# Altium PCB motion_sensor.PcbDoc
Units mm, origin at the board's own origin, x right, y up, seen from the top; angles counter-clockwise.
Board outline 25 x 25 mm, 2 copper layers (Top Layer, Bottom Layer), stack 1.671 mm thick; 48 components, 55 nets, 199 pads, 53 vias.
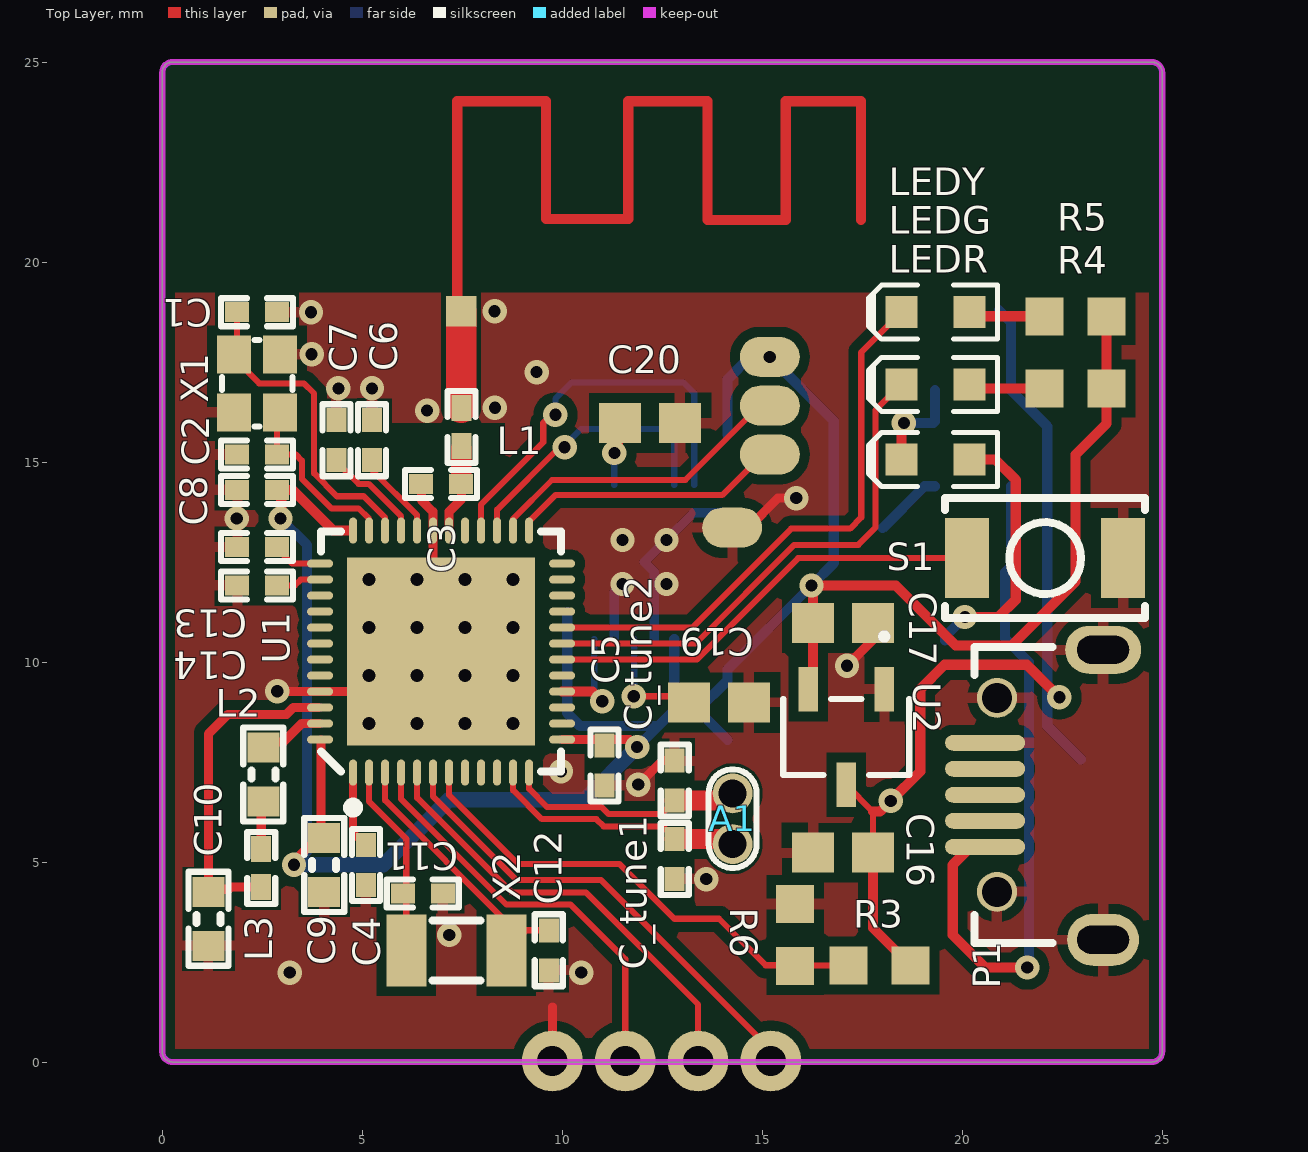
[diagram p0: Top Layer view]
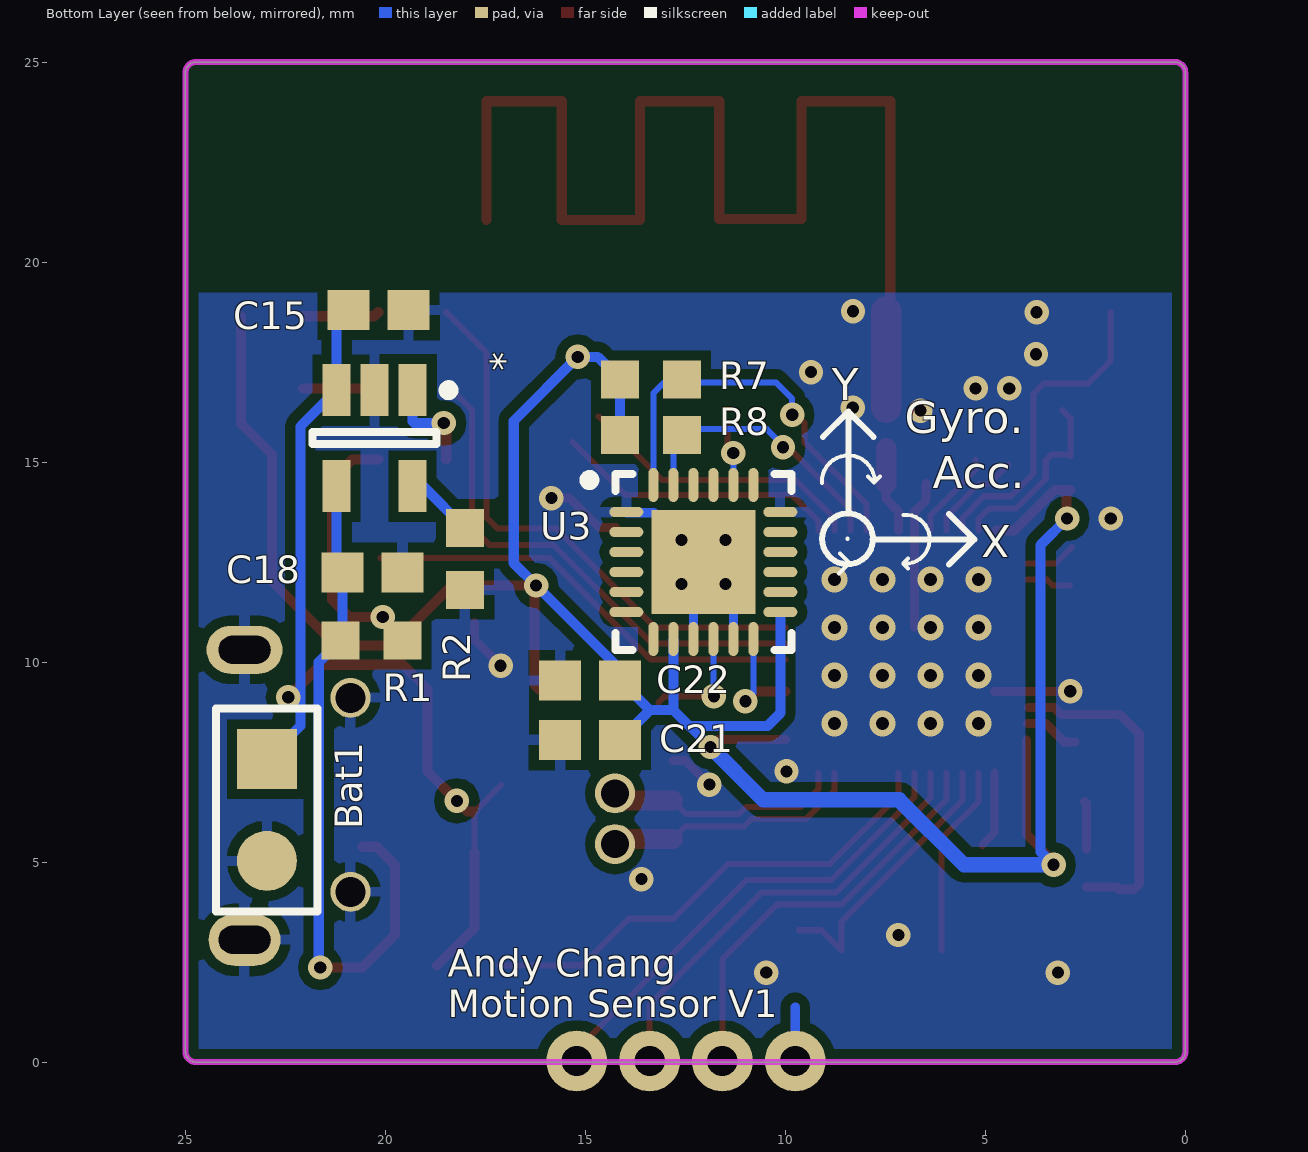
[diagram p1: Bottom Layer view, seen from below]
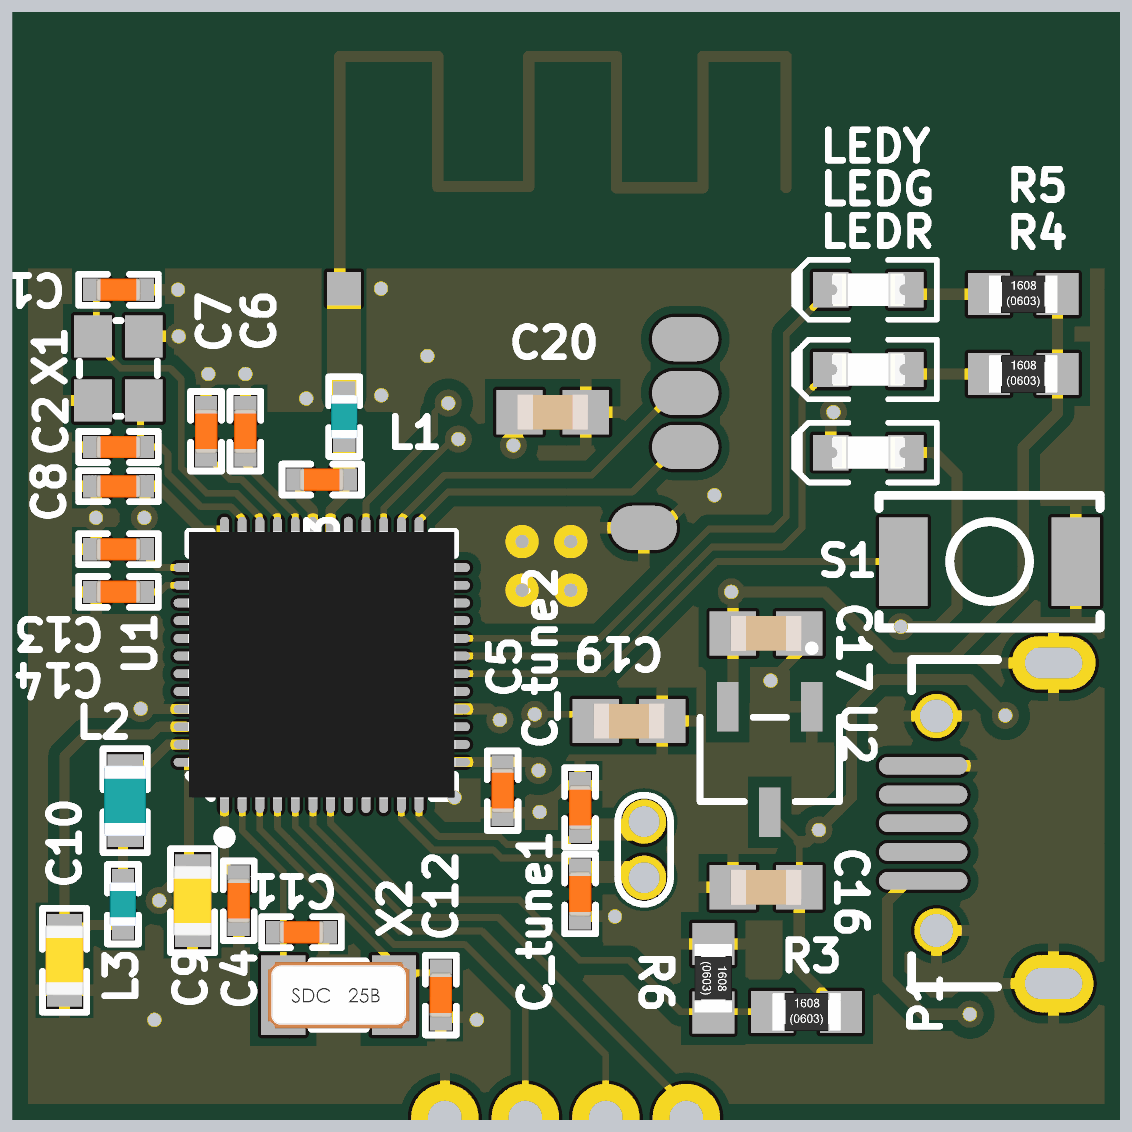
[diagram p2: 3D render of the assembled board from above, using the file's embedded part models]
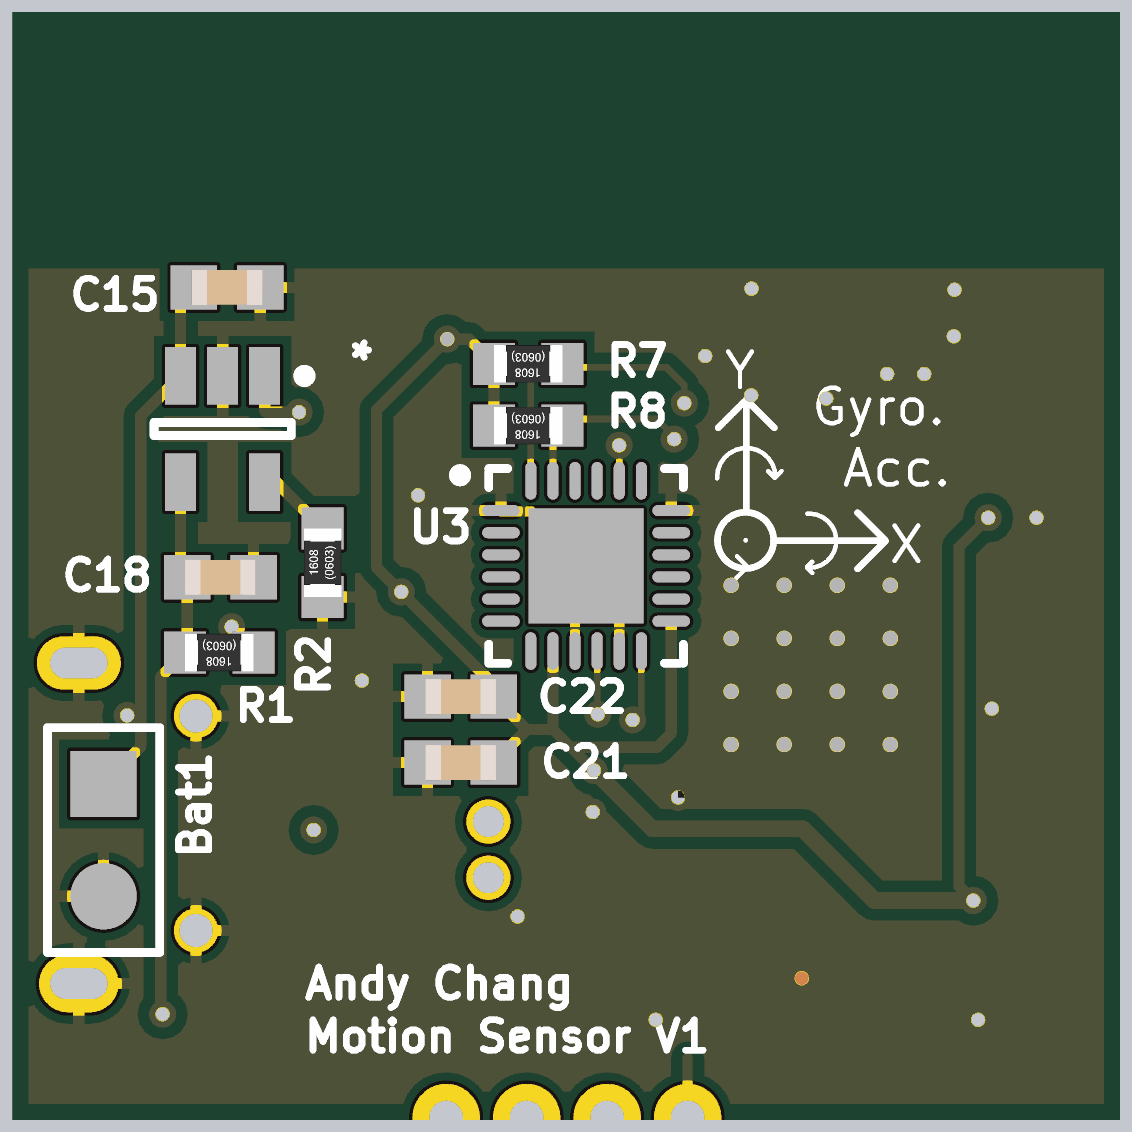
[diagram p3: 3D render of the assembled board from below, using the file's embedded part models]

## Layer stack, top to bottom
Top Solder: solder mask 0.0102, Solder Resist, Dk 3.5
Top Layer: signal copper 0.0356
Dielectric1: core 1.6002, FR-4, Dk 4.8
Bottom Layer: signal copper 0.0356
Bottom Solder: solder mask 0.0102, Solder Resist, Dk 3.5

## Board outline
0.254,0 cw(c0.254,0.254) 0,0.254 0,24.74 cw(c0.26,24.74) 0.26,25 24.733,25 cw(c24.733,24.733) 25,24.733 25,0.26 cw(c24.74,0.26) 24.74,0

## Design rules (kind name [scope] priority, off if disabled: settings)
Clearance Polygon_ANT [(InNamedPolygon('Top_Layer-GND')) or (InNamedPolygon('Bottom_Layer-GND')) vs InNet('RF')] p1: gap=0.127
Clearance Polygon [(InNamedPolygon('Top_Layer-GND')) or (InNamedPolygon('Bottom_Layer-GND'))] p2: gap=0.254
Clearance [All] p3: gap=0.152
ComponentClearance [All] p1 off: gap=0.254 collisioncheckmode=3 verticalgap=0.254 showdistances=FALSE
FabricationTestPointUsage TestPointUsage [All] p1: valid=0 allowmultiple=FALSE
FabricationTestpoint Testpoint [All] p1: side=3 testpointundercomponent=TRUE minsize=1.016 maxsize=2.54 preferedsize=1.524 minholesize=0 maxholesize=1.016 preferedholesize=0.813 testpointgrid=0.025 allowsidetop=TRUE allowsidebottom=TRUE usegrid=TRUE gridtolerance=0
Height [All] p1 off: minheight=0 maxheight=25.4 prefheight=12.7
HoleSize [All] p1: absolutevalues=TRUE maxlimit=4.064 minlimit=0.3 maxpercent=80.000 minpercent=20.000
MinimumAnnularRing [All] p1 off: minimumring=0.152
PolygonConnect PolygonConnect_1 [isVia and innet(gnd)] p1: connectstyle=Direct reliefconductorwidth=0.254 reliefentries=4 polygonreliefangle="90 Angle" airgapwidth=0.254
PolygonConnect [All] p2: connectstyle=Relief reliefconductorwidth=0.254 reliefentries=4 polygonreliefangle="90 Angle" airgapwidth=0.254
RoutingVias [All] p1: holewidth=0.406 width=0.813 viastyle="Through Hole" minholewidth=0.254 minwidth=0.254 maxholewidth=0.711 maxwidth=1.27
ShortCircuit ShortCircuit_NFC_ANT [InNet('NFC1') vs InNet('NFC2')] p1: allowed=TRUE
ShortCircuit [All] p2: allowed=FALSE
SilkToSolderMaskClearance SilkscreenOverComponentPads [IsPad] p1: minsilkscreentomaskgap=0.254 clearancetoexposedcopper=TRUE
SolderMaskExpansion [All] p1: expansion=0.076
Width [All] p1: maxlimit=2.54 minlimit=0.152 preferedwidth=0.152
23 further rules are at their usual default settings.

## Classes and differential pairs
component class mcu: A1 C1 C2 C3 C4 C5 C6 C7 C8 C9 C10 C11 C12 C13 C14 C_tune1 C_tune2 L1 L2 L3 R7 R8 U1 X1 X2
component class port: Bat1 C19 C20 C21 C22 LEDG LEDY R3 R4 R5 R6 S1 U3
component class power: * C15 C16 C17 C18 LEDR P1 R1 R2 U2

## Components (designator, comment, footprint, x,y, rotation, side; value= is the part's Value field where it differs from the comment)
* "MCP73832T-2ACI/OT" SOT-23-OT5_M 20.269,15.596 r270 bottom
A1 "NFC Antenna" TP_2x1mm_TH 14.26,6.083 r180 top
Bat1 "Bat Holder CR2032" HDR1X2 22.962,7.569 r270 bottom
C1 "12pF" CAPC1005X04L 2.373,18.745 r0 top
C2 "12pF" CAPC1005X04L 2.373,15.189 r180 top
C3 "0.8pF" CAPC1005X04L 6.97,14.453 r0 top
C4 "100nF" CAPC1005X04L 5.091,4.928 r270 top
C5 "100nF" CAPC1005X04L 11.06,7.417 r270 top
C6 "N.C." CAPC1005X04L 5.243,15.545 r270 top
C7 "100pF" CAPC1005X04L 4.354,15.545 r90 top
C8 "100nF" CAPC1005X04L 2.373,14.3 r180 top
C9 "4.7µF" CAPC1608X06L 4.049,4.928 r270 top
C10 "1.0µF" CAPC1608X06L 1.154,3.581 r90 top
C11 "12pF" CAPC1005X04L 6.513,4.216 r0 top
C12 "12pF" CAPC1005X04L 9.663,2.794 r270 top
C13 "12pF" CAPC1005X04L 2.373,12.878 r180 top
C14 "12pF" CAPC1005X04L 2.373,11.913 r180 top
C15 "Cap Semi" C0603 20.168,18.796 r0 bottom
C16 "Cap Semi" C0603 17.018,5.232 r0 top
C17 "Cap Semi" C0603 17.018,10.973 r180 top
C18 "Cap Semi" C0603 20.32,12.243 r0 bottom
C19 "Cap Semi" C0603 13.919,8.992 r180 top
C20 "Cap Semi" C0603 12.192,15.977 r180 top
C21 "Cap Semi" C0603 14.884,8.052 r180 bottom
C22 "Cap Semi" C0603 14.884,9.544 r180 bottom
C_tune1 "TBD" CAPC1005X04L 12.812,5.08 r270 top
C_tune2 "TBD" CAPC1005X04L 12.812,7.036 r270 top
L1 "3.9nH" INDC1005X04L 7.478,15.875 r90 top
L2 "10µH" INDC1608X06L 2.525,7.188 r90 top
L3 "15nH" INDC1005X04L 2.475,4.851 r90 top
LEDG "LED" 0603 19.329,16.942 r180 top
LEDR "LED" 0603 19.329,15.062 r180 top
LEDY "LED" 0603 19.329,18.745 r180 top
P1 "USB-MICRO" USB-MICRO 23.52,6.68 r90 top
R1 "Resistors SMD" R0603-M 20.345,10.541 r0 bottom
R2 "Resistors SMD" R0603-M 18.009,12.573 r90 bottom
R3 "Resistors SMD" R0603-M 17.932,2.413 r0 top
R4 "Resistors SMD" R0603-M 22.835,16.84 r0 top
R5 "Resistors SMD" R0603-M 22.835,18.644 r0 top
R6 "Resistors SMD" R0603-M 15.824,3.175 r270 top
R7 "Resistors SMD" R0603-M 13.36,17.069 r0 bottom
R8 "Resistors SMD" R0603-M 13.36,15.672 r0 bottom
S1 "SW-PB" SWITCH_SMD_4x3_DHT-1185 22.073,12.598 r180 top
U1 "nRF52832-QFAA" QFN40P600X600X90-48N 6.97,10.262 r90 top locked
U2 "XC6206P121MR" SOT-23 17.101,8.123 r180 top
U3 "MPU-6050" MPU-6050 12.05,12.5 r180 bottom
X1 "32MHz" BT-XTAL_2016 2.373,16.967 r270 top
X2 "32.768kHz" XTAL_3215 7.351,2.794 r0 top

## Footprints (in the part's own frame and the unit in brackets; to place one, negate y for a bottom-side part, rotate by r counter-clockwise, add the part's x,y. Pads: shape width x height; smd on the part's side, far side on the other; paste and mask are expansions set on the pad)
0603 [mm]
  round 0.254 on Mech15: 0(0,0)
  rect 0.8x0.8 smd: 1(-0.85,0) 2(0.85,0)
  Top Layer pour cut-out: -0.5,0.5 0.5,0.5 0.5,-0.5 -0.5,-0.5
  silkscreen extent -1.55,-0.67 1.68,0.67, body extent -0.83,-0.36 0.83,0.36, height 0.68
BT-XTAL_2016 [mm] "Crystal 2.0 x 1.6 mm"
  rect 0.95x0.85 smd: 1(-0.725,-0.575) 2(0.725,-0.575) 3(0.725,0.575) 4(-0.725,0.575)
  silkscreen extent -1.08,-0.88 1.08,0.88
C0603 [mm] "Chip Capacitor, EIA 0603, IPC-7351 Level B Medium Density"
  round 0.254 on Mech15: 0(0,0)
  rect 1.05x1 smd: 1(-0.75,0) 2(0.75,0)
  Top Layer pour cut-out: -0.2,0.5 0.2,0.5 0.2,-0.5 -0.2,-0.5
  body extent -0.8,-0.4 0.8,0.4, height 0.78
CAPC1005X04L [mm] "Chip Capacitor, 2-Leads, Body 1.0x0.5mm, IPC High Density"
  rect 0.6x0.5 smd: 1(-0.5,0) 2(0.5,0)
  silkscreen extent -0.9,-0.35 0.9,0.35, body extent -0.51,-0.25 0.51,0.25, height 0.5
CAPC1608X06L [mm] "Chip Capacitor, 2-Leads, Body 1.6x0.8mm, IPC High Density"
  rect 0.75x0.8 smd: 1(-0.675,0) 2(0.675,0)
  silkscreen extent -1.17,-0.5 1.17,0.5, body extent -0.8,-0.43 0.8,0.43, height 0.8
HDR1X2 [mm] "Connector; Header; 2 Position"
  rect 1.5x1.5 smd: 1(0,0)
  round 1.5 smd: 2(2.54,0)
  silkscreen extent -1.27,-1.27 3.81,1.27
INDC1005X04L [mm] "Chip Inductor, 2-Leads, Body 1.0x0.5mm, IPC High Density"
  rect 0.65x0.5 smd: 1(-0.475,0) 2(0.475,0)
  silkscreen extent -0.9,-0.35 0.9,0.35, body extent -0.5,-0.3 0.5,0.3, height 0.5
INDC1608X06L [mm] "Chip Inductor, 2-Leads, Body 1.6x0.8mm, IPC High Density"
  rect 0.75x0.8 smd: 1(-0.675,0) 2(0.675,0)
  silkscreen extent -1.18,-0.5 1.17,0.5, body extent -0.8,-0.48 0.8,0.48, height 0.8
MPU-6050 [mm] "QFN, 24-Leads, Body 4.00x4.00mm, Pitch 0.50mm, Thermal Pad 2.60x2.60mm, IPC Medium Density"
  oval 0.85x0.25 smd: 1(-1.925,1.25) 2(-1.925,0.75) 3(-1.925,0.25) 4(-1.925,-0.25) 5(-1.925,-0.75) 6(-1.925,-1.25) 13(1.925,-1.25) 14(1.925,-0.75) 15(1.925,-0.25) 16(1.925,0.25) 17(1.925,0.75) 18(1.925,1.25)
  oval 0.25x0.85 smd: 7(-1.25,-1.925) 8(-0.75,-1.925) 9(-0.25,-1.925) 10(0.25,-1.925) 11(0.75,-1.925) 12(1.25,-1.925) 19(1.25,1.925) 20(0.75,1.925) 21(0.25,1.925) 22(-0.25,1.925) 23(-0.75,1.925) 24(-1.25,1.925)
  rect 2.6x2.6 smd: 25(0,0)
  silkscreen extent -2.98,-2.2 2.2,2.2, body extent -2.05,-2.05 2.05,2.05, height 0.95
QFN40P600X600X90-48N [mm] "QFN, 48-Leads, Body 6,0x6,0mm (max), Pitch 0,40mm, IPC Medium Density"
  oval 0.65x0.2 smd: 1(-3.025,2.2) 2(-3.025,1.8) 3(-3.025,1.4) 4(-3.025,1) 5(-3.025,0.6) 6(-3.025,0.2) 7(-3.025,-0.2) 8(-3.025,-0.6) 9(-3.025,-1) 10(-3.025,-1.4) 11(-3.025,-1.8) 12(-3.025,-2.2) 25(3.025,-2.2) 26(3.025,-1.8) 27(3.025,-1.4) 28(3.025,-1) 29(3.025,-0.6) 30(3.025,-0.2) 31(3.025,0.2) 32(3.025,0.6) 33(3.025,1) 34(3.025,1.4) 35(3.025,1.8) 36(3.025,2.2)
  oval 0.2x0.65 smd: 13(-2.2,-3.025) 14(-1.8,-3.025) 15(-1.4,-3.025) 16(-1,-3.025) 17(-0.6,-3.025) 18(-0.2,-3.025) 19(0.2,-3.025) 20(0.6,-3.025) 21(1,-3.025) 22(1.4,-3.025) 23(1.8,-3.025) 24(2.2,-3.025) 37(2.2,3.025) 38(1.8,3.025) 39(1.4,3.025) 40(1,3.025) 41(0.6,3.025) 42(0.2,3.025) 43(-0.2,3.025) 44(-0.6,3.025) 45(-1,3.025) 46(-1.4,3.025) 47(-1.8,3.025) 48(-2.2,3.025)
  rect 4.7x4.7 smd: 49(0,0)
  silkscreen extent -4.02,-3 3,3, body extent -3.02,-3.02 3.02,3.02, height 0.86
R0603-M [mm] "Chip Resistor, 2-Leads, Body 1.68x0.88mm, IPC Medium Density"
  rect 0.95x0.95 smd: 1(-0.775,0) 2(0.775,0)
  Top Layer pour cut-out: -0.254,0.675 0.254,0.675 0.254,-0.675 -0.254,-0.675
  body extent -0.77,-0.42 0.78,0.43, height 0.44
SOT-23 [mil]
  rect 19x44 smd paste+0 mask+0: 1(-37.4,-47) 2(37.4,-47) 3(0,47)
  silkscreen extent -62,-102 62,38, body extent 0,0 10,10, height 10
SOT-23-OT5_M [mm]
  rect 1.3x0.7 smd: 1(-1.2,0.95) 2(-1.2,0) 3(-1.2,-0.95) 4(1.2,-0.95) 5(1.2,0.95)
  silkscreen extent -1.32,-1.55 0.15,1.97, body extent -0.9,-1.55 0.9,1.55, height 1.45
SWITCH_SMD_4x3_DHT-1185 [mm]
  rect 1.1x2 smd: 1(-1.95,0) 2(1.95,0)
  silkscreen extent -2.5,-1.5 2.5,1.5
TP_2x1mm_TH [mm]
  round 1 hole 0.7: 1(0,-0.635) 2(0,0.635)
  silkscreen extent -0.6,-1.23 0.6,1.23
USB-MICRO [mm] "USB方孔"
  oval 1.3x1.8 hole 0.7 slot 1.3 at 90 deg: 0(-3.625,0)
  round 1 hole 0.75: 0(-2.425,2.65) 0(2.425,2.65)
  oval 1.2x1.9 hole 0.7 slot 1.3 at 90 deg: 0(3.625,0)
  oval 0.4x2 smd: 1(-1.3,2.95) 2(-0.65,2.95) 3(0,2.95) 4(0.65,2.95) 5(1.3,2.95)
  silkscreen extent -3.7,1.27 3.7,3.21
XTAL_3215 [mm] "XTAL SMD 3.2 x 1.5 mm"
  rect 1x1.8 smd: 1(-1.25,0) 2(1.25,0)
  silkscreen extent -0.6,-0.75 0.6,0.75, body extent -1.6,-0.75 1.6,0.75, height 0.81

## Part data
A1: library part NFC_ANT_TP
Bat1: "Bat Holder CR2032 SMD"
C1 C2 C11 C12 C13 C14: library part C0402-12p, "Capacitor, NP0, ∮2%"
C3: library part C0402-0.8p, "Capacitor, NP0, ∮5%"
C4 C5 C8: library part C0402-100n, "Capacitor, X7R, ∮10%"
C6: library part C0402-N.C., "Not mounted"
C7: library part C0402-100p, "Capacitor, NP0, ∮5%"
C9: library part C0603-4£g7, "Capacitor, X5R, ∮10%"
C10: library part C0603-1£g0, "Capacitor, X7R, ∮10%"
C15 C16 C17 C18 C19 C20 C21 C22: "Capacitor (Semiconductor SIM Model)"
C_tune1 C_tune2: library part C0402-TBD, "Capacitor, NP0, ∮5%"
L1: library part L0402-3n9, "High frequency chip inductor ∮5%"
L2: library part L0603-10£g, "Chip inductor, IDC,min = 50 mA, ∮20%"
L3: library part L0402-15n, "High frequency chip inductor ∮10%"
LEDG LEDR LEDY: "Typical INFRARED GaAs LED"
R1 R2 R3 R4 R5 R6 R7 R8: "Resistor"
S1: "Switch"
U1: "Multi-protocol Bluetooth Low Energy, ANT and 2.4GHz proprietary system-on-chip"
U2: "Imported"
X1: library part XTAL_SMD2016_32MHz_8pF_General, "XTAL SMD 2016, 32MHz, Cl=8pF, Total Tol: ∮40ppm"
X2: library part XTAL_SMD3215_32.768kHz_9pF_General, "XTAL SMD 3215, 32.768kHz, Cl=9pF, Total Tol: ∮50ppm"

## Free pads (board coordinates)
  rect 0.762x0.762 smd: 0(7.472,18.771)
  oval 1.5x1 smd: 2(14.249,13.36) 2(15.189,15.189) 2(15.189,16.408) 2(15.189,17.628)
  round 1.524 hole 0.762: 3(9.754,0.025) 4(11.574,0.025) 5(13.394,0.025) 6(15.215,0.025)

## Via types
v1: diameter 0.61, hole 0.305, Top Layer to Bottom Layer, tented both sides, 33 vias
v2: diameter 0.66, hole 0.33, Top Layer to Bottom Layer, tented both sides, 16 vias
v3: diameter 0.6, hole 0.3, Top Layer to Bottom Layer, tented bottom, 4 vias

## Nets (pads, with @x,y where several pads share a name; then routed paths per layer and width w, separated by ;. In a path a pad name is that pad's centre, name@x,y a point inside that pad or via, vN(x,y) a via of type N, cw(c..) or ccw(c..) an arc to the next point about the centre after c; other vN are vias at no path point)
3V3: C5.1 C8.1 C9.1 C17.2 C21.2 C22.2 pad.2@15.189,17.628 R4.2 R5.2 R7.2 R8.2 U1.13 U1.36 U1.48 U2.2 U3.8 U3.13 | length 68
  Top Layer w0.229: v1(3.293,4.932) 3.293,5.015 3.97,5.692 U1.48@3.97,8.052 ; U1.13 11.685,8.062 v1(11.873,7.874)
  Top Layer w0.254: C8.1 2.974,14.3 2.974,13.606 v1(2.957,13.589) ; C8.1@2.898,14.3 3.262,14.3 4.275,13.287 U1.36@4.735,13.287 ; U2.2 16.268,9.434 C17.2 16.268,11.875 v1(16.231,11.913) 18.339,11.913 19.837,10.414 21.234,10.414 22.835,12.014 22.835,15.189 23.61,15.964 R4.2 R5.2
  Bottom Layer w0.254: v1(2.957,13.589) 3.618,12.928 3.618,5.256 v1(3.293,4.932) ; U3.13 10.125,8.721 10.45,8.397 12.395,8.397 ; v1(11.873,7.874) 12.8,8.802 ; U3.8 12.8,8.802 ; C21.2 13.392,8.794 13.392,8.802 ; R8.2 R7.2 14.694,17.628 v1(15.189,17.628) 16.789,16.027 16.789,12.471 v1(16.231,11.913) 14.134,9.816 C22.2 13.392,8.802 ; 12.8,8.802 13.392,8.802
  Bottom Layer w0.381: v1(3.293,4.932) 5.531,4.932 7.154,6.554 10.553,6.554 v1(11.873,7.874)
5V: *.4 C18.2 P1.1 R1.2 | length 17.3
  Top Layer w0.254: P1.1 20.214,5.38 19.761,4.928 19.761,3.175 20.574,2.362 v1(21.626,2.362)
  Bottom Layer w0.254: *.4 21.219,12.392 C18.2 21.07,10.591 R1.2 21.666,9.995 v1@21.666,2.362
DEC1: C4.1 U1.1 | length 1.9
  Top Layer w0.203: U1.1 4.77,5.733 C4.1@5.071,5.432
DEC2: C6.2 U1.32 | length 2.2
  Top Layer w0.152: C6.2@5.243,15.062 5.243,14.8 6.37,13.673 U1.32
DEC3: C7.1 U1.33 | length 2.4
  Top Layer w0.152: C7.1@4.424,14.937 4.908,14.453 5.159,14.453 5.97,13.642 U1.33
DEC4: C10.2 L3.1 U1.46 | length 8.2
  Top Layer w0.229: L3.1 1.716,4.376 1.657,4.318 1.281,4.318 1.154,4.445 1.154,8.2 1.641,8.687 3.104,8.687 3.279,8.862 U1.46@3.915,8.862
GND: *.2 Bat1.2 C1.2 C2.2 C3.1 C4.2 C5.2 C6.1 C7.2 C8.2 C9.2 C10.1 C11.2 C12.2 C13.2 C14.2 C15.1 C16.1 C17.1 C18.1 C19.1 C20.1 C21.1 C22.1 C_tune1.2 C_tune2.1 P1.0 P1.5 pad.2@14.249,13.36 pad.3 R2.1 R6.1 S1.1 U1.31 U1.45 U1.49 U2.1 U3.1 U3.9 U3.11 U3.18 U3.25 X1.2 X1.4 | length 18.3
  Top Layer w0.229: v1@2.876,9.262 U1.45 U1.49@4.77,9.262 ; C3.1@6.48,14.461 6.48,14.048 6.767,13.761 U1.49@6.767,10.879 ; pad.3 9.754,1.372 ; v1(11.898,6.934) 12.5,7.536 C_tune2.1 ; pad.2@14.249,13.36 14.656,13.36 15.392,14.097 v1(15.85,14.097) ; v1(17.12,9.906) 17.768,10.554 C17.1
  Bottom Layer w0.229: pad.3 9.754,1.372 ; U3.11 U3.25@11.3,11.75 ; U3.9 12.3,12.25 U3.25 v3(12.6,13.05) 13.284,13.733 13.975,13.733 U3.1
  other v1: 3.186,2.235 10.476,2.235 7.174,3.175 13.6,4.572 9.97,7.264 2.876,9.271 1.865,13.589 6.621,16.285 8.317,16.358 4.405,16.84 5.243,16.84 9.358,17.247 3.735,17.692 3.719,18.745 8.31,18.771
  other v2: 5.17,8.462 6.37,8.462 7.57,8.462 8.77,8.462 5.17,9.662 6.37,9.662 7.57,9.662 8.77,9.662 5.17,10.862 6.37,10.862 7.57,10.862 8.77,10.862 5.17,12.062 6.37,12.062 7.57,12.062 8.77,12.062
  other v3: 11.5,11.95 12.6,11.95 11.5,13.05
I2C_SCL: R8.1 U1.27 U3.23 | length 7
  Top Layer w0.152: U1.27 8.37,13.806 9.931,15.367 v1(10.058,15.367)
  Bottom Layer w0.152: v1@10.02,15.38 10.465,15.824 12.471,15.824 12.8,15.495 U3.23
I2C_SDA: R7.1 U1.28 U3.24 | length 10.2
  Top Layer w0.152: U1.28 7.97,13.939 9.525,15.494 9.525,15.977 9.728,16.18 v1(9.83,16.18)
  Bottom Layer w0.152: v1(9.83,16.18) 9.83,16.586 10.236,16.993 13.03,16.993 13.3,16.722 U3.24
MPU_INT: U1.16 U3.12 | length 2.7
  Top Layer w0.254: U1.16 10.754,9.262 v1(10.998,9.017)
  Bottom Layer w0.152: U3.12 10.8,9.215 v1(10.998,9.017)
Net*_1: *.1 LEDR.2 | length 2.5
  Top Layer w0.254: LEDR.2 18.479,15.914 v1(18.542,15.977)
  Bottom Layer w0.254: v1(18.542,15.977) 19.279,15.977 19.319,16.017 *.1
Net*_5: *.5 R2.2 | length 1.7
  Bottom Layer w0.254: R2.2 19.056,14.396 *.5
NetC3_2: C3.2 L1.1 U1.30 | length 2.2
  Top Layer w0.229: U1.30 7.17,13.762 7.48,14.071 C3.2@7.48,14.461
  Top Layer w0.508: C3.2@7.475,14.453 L1.1@7.475,15.35
NetC19_2: C19.2 U3.10 | length 2.8
  Top Layer w0.152: v1(11.786,9.144) 13.017,9.144 C19.2
  Bottom Layer w0.152: U3.10 11.8,9.256 v1@11.836,9.22
NetC20_2: C20.2 U3.20 | length 1.6
  Top Layer w0.152: v1(11.303,15.227) 11.442,15.366 C20.2
  Bottom Layer w0.152: U3.20 v1@11.3,15.227
NetL2_1: L2.1 L3.2 | length 1.2
  Top Layer w0.229: L3.2 2.475,6.462 L2.1
NetL2_2: L2.2 U1.47 | length 1.4
  Top Layer w0.229: L2.2@2.763,8.001 3.028,8.001 3.489,8.462 U1.47
NetLEDG_1: LEDG.1 R4.1 | length 1.9
  Top Layer w0.254: LEDG.1 20.281,16.84 R4.1
NetLEDR_1: LEDR.1 R1.1 | length 6.6
  Top Layer w0.254: v1(20.066,11.125) 20.904,11.125 21.336,11.557 21.336,14.554 20.828,15.062 LEDR.1
  Bottom Layer w0.254: R1.1 19.57,10.63 v1(20.066,11.125)
NetLEDY_1: LEDY.1 R5.1 | length 1.9
  Top Layer w0.254: LEDY.1 20.281,18.644 R5.1
NFC1: A1.2 C_tune1.1 U1.11 | length 6.5
  Top Layer w0.152: U1.11 8.77,6.795 9.491,6.074 10.628,6.074 10.852,6.074 11.034,5.893 12.508,5.893 C_tune1.1@12.812,5.588
  Top Layer w0.5: C_tune1.1 14.128,5.58 A1.2
NFC2: A1.1 C_tune2.2 U1.12 | length 6
  Top Layer w0.152: U1.12 9.17,6.826 9.617,6.379 10.98,6.379 11.161,6.198 12.474,6.198 C_tune2.2
  Top Layer w0.5: C_tune2.2 14.078,6.536 A1.1
P0.00/XL1: C11.1 U1.2 X2.1 | length 4.8
  Top Layer w0.152: U1.2 5.17,6.51 6.101,5.579 X2.1
P0.01/XL2: C12.1 U1.3 X2.2 | length 7
  Top Layer w0.152: U1.3 5.57,6.541 8.601,3.51 X2.2 9.101,3.294 C12.1
P0.02/AIN0: pad.4 U1.4 | length 10.2
  Top Layer w0.152: U1.4 5.97,6.573 8.606,3.937 10.211,3.937 11.574,2.574 pad.4@11.574,0.305
P0.03/AIN1: pad.5 U1.5 | length 10.9
  Top Layer w0.152: U1.5 6.37,6.604 8.732,4.242 10.591,4.242 13.394,1.439 pad.5@13.394,0.305
P0.04/AIN2: pad.6 U1.6 | length 11.7
  Top Layer w0.152: U1.6 6.77,6.636 8.859,4.548 9.282,4.548 10.972,4.547 pad.6@15.215,0.305
P0.05/AIN3: R3.1 R6.2 U1.7 | length 12.3
  Top Layer w0.152: U1.7 7.17,6.671 8.888,4.953 11.43,4.953 12.802,3.581 13.919,3.581 15.083,2.418 15.704,2.418 17.153,2.418 R3.1
P0.06: U1.8
P0.07: U1.9
P0.08: U1.10
P0.11: U1.14
P0.12: U1.15
P0.14: U1.17
P0.15: S1.2 U1.18 | length 11.2
  Top Layer w0.152: U1.18 13.364,10.062 15.9,12.598 S1.2
P0.16: LEDG.2 U1.19 | length 12.9
  Top Layer w0.152: U1.19 13.332,10.462 15.799,12.929 17.399,12.929 17.831,13.36 17.831,16.293 LEDG.2
P0.17: LEDY.2 U1.20 | length 14.2
  Top Layer w0.152: U1.20 13.249,10.862 15.723,13.335 17.196,13.335 17.475,13.614 17.475,17.741 LEDY.2
P0.18: U1.21
P0.19: U1.22
P0.20: U1.23
P0.21: U1.24
P0.24: U1.29
P0.25: C13.1 U1.37 | length 1.3
  Top Layer w0.152: C13.1@2.83,12.878 3.246,12.462 U1.37
P0.26: C14.1 U1.38 | length 1.1
  Top Layer w0.152: C14.1@2.881,11.912 3.314,11.912 3.463,12.062 U1.38
P0.27: U1.39
P0.28/AIN4: U1.40
P0.29/AIN5: U1.41
P0.30/AIN6: U1.42
P0.31/AIN7: U1.43
RF: L1.2 pad.0 | length 33
  Top Layer w0.254: 7.377,18.294 7.377,24.021 9.595,24.021 9.595,21.077 11.652,21.077 11.652,24.021 13.633,24.021 13.633,21.052 15.589,21.052 15.589,24.021 17.469,24.021 17.469,21.057
  Top Layer w0.762: L1.2@7.472,16.358 pad.0
SWDCLK: pad.2@15.189,15.189 U1.25 | length 7.2
  Top Layer w0.152: U1.25 9.17,13.514 9.83,14.173 13.995,14.173 pad.2@15.316,15.494
SWDIO: pad.2@15.189,16.408 U1.26 | length 7.3
  Top Layer w0.152: U1.26 8.77,13.576 9.744,14.55 13.077,14.55 pad.2@14.668,16.142
VBAT: *.3 Bat1.1 C15.2 C16.2 R3.2 U2.3 | length 25
  Top Layer w0.152: U2.3 17.768,6.262 C16.2
  Top Layer w0.254: C16.2 17.768,3.352 R3.2 ; 17.768,6.262 17.946,6.262 v1(18.212,6.528) 18.948,7.264 18.948,9.322 19.558,9.931 21.615,9.931 v1(22.428,9.119)
  Bottom Layer w0.254: C15.2 21.219,18.494 *.3 22.123,15.891 22.123,8.407 Bat1.1
XC1: C1.1 U1.34 X1.1 | length 8
  Top Layer w0.152: C1.1 1.873,17.518 2.424,16.967 3.541,16.967 3.795,16.713 3.795,14.717 4.367,14.145 5.036,14.145 5.57,13.611 U1.34
XC2: C2.1 U1.35 X1.3 | length 4.8
  Top Layer w0.152: C2.1@2.873,15.138 2.873,16.095 X1.3@3.073,16.295 ; C2.1@2.881,15.189 3.338,15.189 3.49,15.037 3.49,14.58 4.23,13.84 4.906,13.84 5.17,13.576 U1.35
pads on no net: C15.0 C16.0 C17.0 C18.0 C19.0 C20.0 C21.0 C22.0 LEDG.0 LEDR.0 LEDY.0 P1.2 P1.3 P1.4 U1.44 U3.2 U3.3 U3.4 U3.5 U3.6 U3.7 U3.14 U3.15 U3.16 U3.17 U3.19 U3.21 U3.22

## Polygon pours and split planes (outlines as drawn)
GND on Top Layer "Top_Layer-GND" (solid, remove dead copper, pour order 1000): -0.345,-2.692 29.667,-2.692 29.667,19.609 -0.345,19.609
GND on Bottom Layer "Bottom_Layer-GND" (solid, remove dead copper, pour order 1001): -0.356,-1.626 26.035,-1.626 26.035,20.574 -0.356,20.574

## Keep-outs
Keep-Out Layer:
  the board outline again, w0.152

## Other copper
Top Layer:
  pour cut-out: 8.571,15.977 8.571,13.233 5.675,13.233 5.675,15.977
  pour cut-out: 27.534,24.892 27.534,19.228 -0.864,19.228 -0.864,24.892
Bottom Layer:
  pour cut-out: 25.578,24.892 25.578,19.228 -1.956,19.228 -1.956,24.892

## Silkscreen, mask and mechanical layers (free items; w line width, h text height)
Bottom Overlay:
  circle w0.15: c8.444,13.077 r0.635
  lines w0.1: 6.936,12.339 7.053,12.456 ; 6.936,12.593 7.053,12.476 ; 7.028,12.455 cw(c7.005,13.068) 7.046,13.681 ; 7.631,14.643 7.783,14.491 7.936,14.643 ; 7.767,14.506 cw(c8.428,14.506) 9.088,14.48 ; 8.411,12.468 8.661,12.218 ; 8.411,12.493 8.636,12.718 ; 8.444,13.076 8.444,13.077 8.444,13.085 ; 7.811,13.093 7.811,13.093 ; 7.986,12.618 7.986,12.618 ; 8.611,13.693 8.611,13.718 8.611,13.693
  lines w0.15: 5.913,12.433 5.278,13.068 ; 5.913,13.703 5.278,13.068 ; 7.793,15.624 8.428,16.259 ; 7.818,13.068 5.278,13.068 ; 8.428,13.719 8.428,16.259 ; 9.063,15.624 8.428,16.259
  text "Y" at 8.161,16.543 h0.8
  text "Gyro." at 7.01,15.723 h0.8
  text "Acc." at 6.311,14.338 h0.8
  text "X" at 4.361,13.418 h0.8 r180
  text "Andy Chang" at 18.44,2.134 h0.69
  text "Motion Sensor V1" at 18.44,1.118 h0.69
Mechanical 1:
  the board outline again, w0.152